# Altium PCB simpleROM.PcbDoc
Units mil, origin at the board's own origin, x right, y up, seen from the top; angles counter-clockwise.
Board outline 1974.25 x 2407 mil, 2 copper layers (Top, Bottom), stack 65.748 mil thick; 4 components, 29 nets, 66 pads, 41 vias.
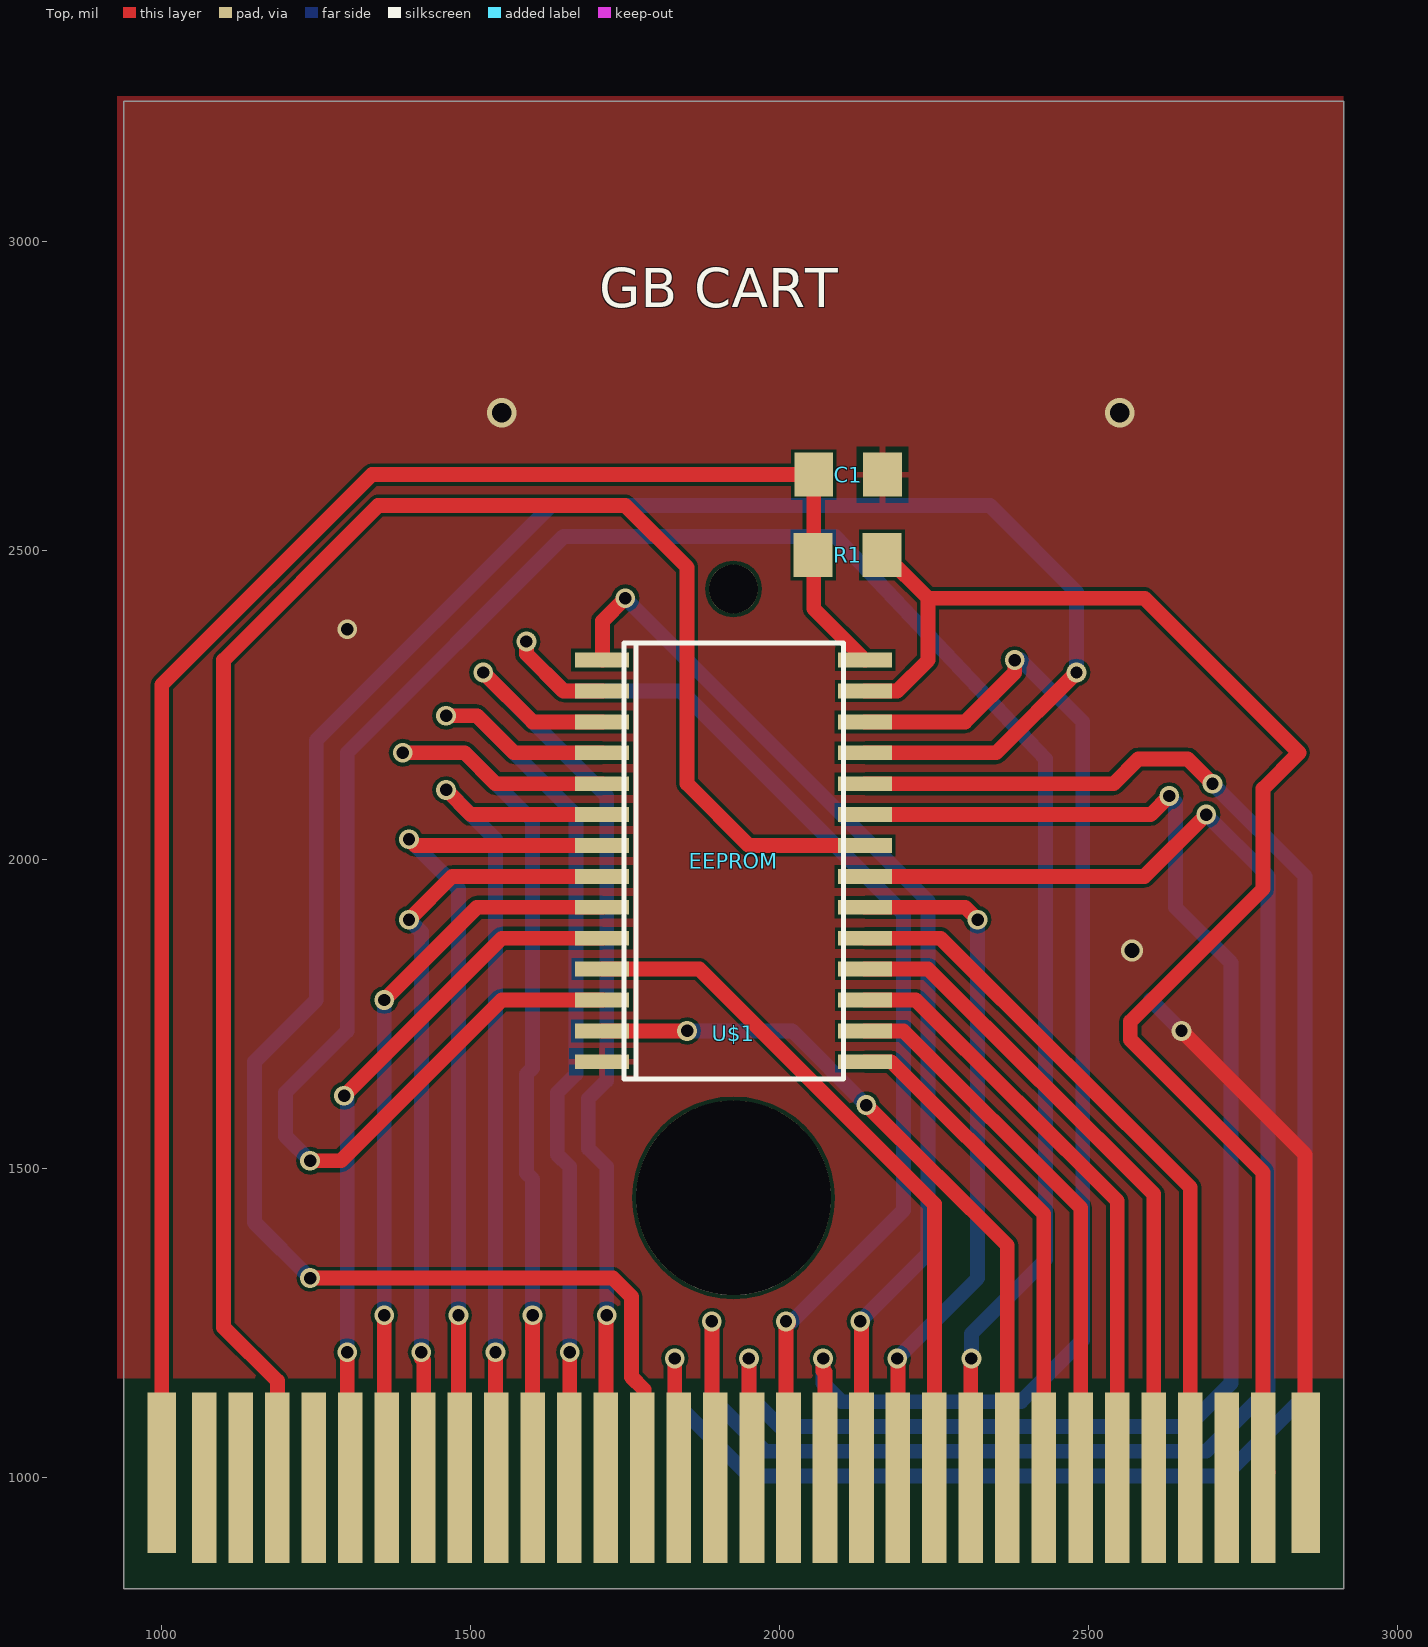
[diagram p0: Top view]
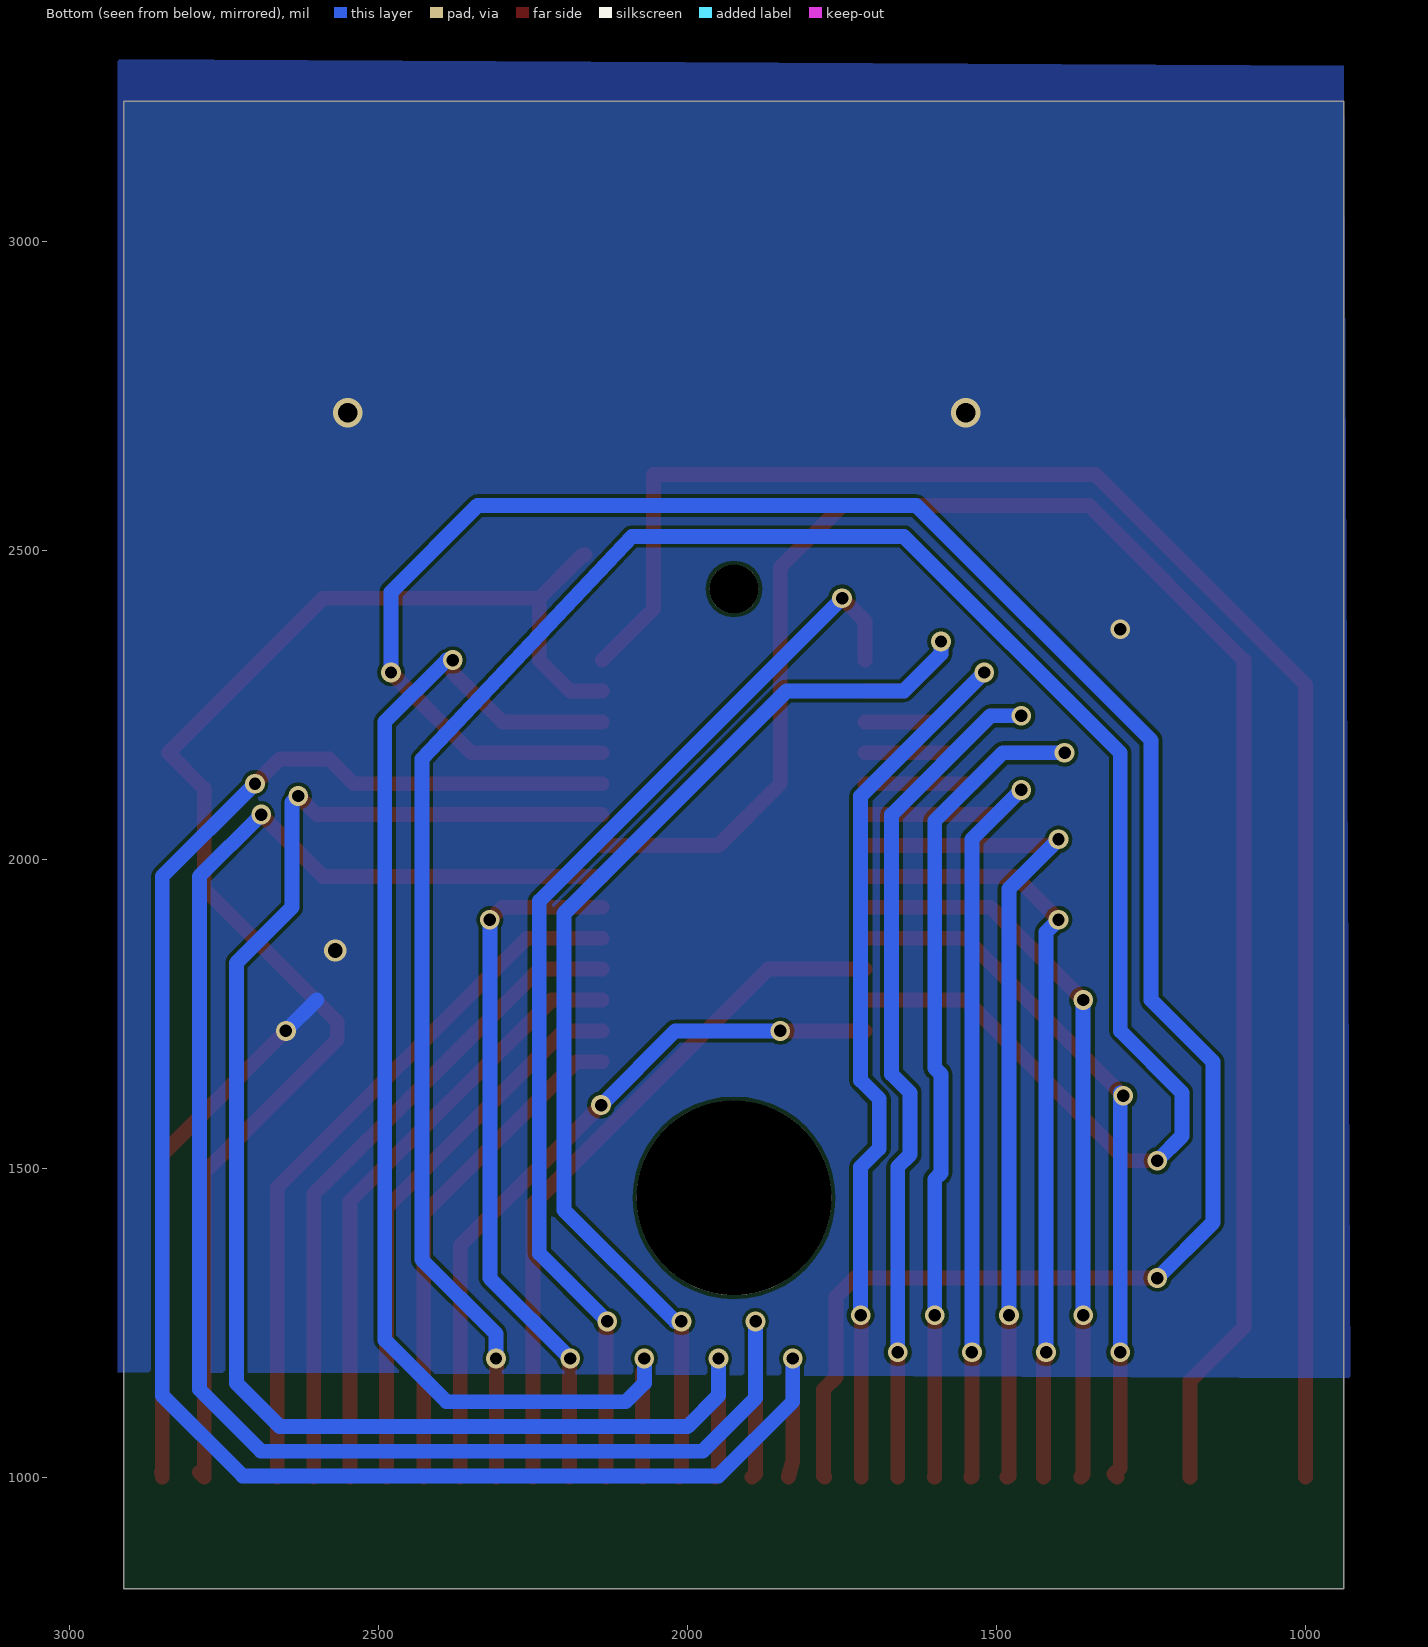
[diagram p1: Bottom view, seen from below]

## Layer stack, top to bottom
Top Solder: solder mask 0.4, Solder Resist, Dk 3.5
Top: signal copper 1.378
Dielectric 1: core 62.9921, FR-4, Dk 4.8
Bottom: signal copper 1.378
Bottom Solder: solder mask 0.4, Solder Resist, Dk 3.5

## Board outline
938.25,819.5 2912.5,819.5 2912.5,3226.5 938.25,3226.5

## Design rules (kind name [scope] priority, off if disabled: settings)
Clearance mdViaVia [IsVia vs IsVia] p1: gap=8
Clearance mdPadVia [IsPad vs IsVia] p2: gap=6
Clearance mdPadPad [IsPad vs IsPad] p3: gap=6
Clearance mdWireVia [(InLayerClass('Signal Layers') AND IsTrack) vs IsVia] p4: gap=6
Clearance mdWirePad [(InLayerClass('Signal Layers') AND IsTrack) vs IsPad] p5: gap=6
Clearance mdWireWire [(InLayerClass('Signal Layers') AND IsTrack) vs (InLayerClass('Signal Layers') AND IsTrack)] p6: gap=6
Clearance [All] p7: gap=6
HoleSize [All] p1: absolutevalues=TRUE maxlimit=100000 minlimit=12 maxpercent=80.000 minpercent=20.000
HoleToHoleClearance [All] p1: gap=8 allowstackedmicrovias=TRUE
PolygonConnect ThermalVias [IsVia] p1: connectstyle=Direct reliefconductorwidth=10 reliefentries=4 polygonreliefangle="90 Angle" airgapwidth=10
PolygonConnect [All] p2: connectstyle=Relief reliefconductorwidth=10 reliefentries=4 polygonreliefangle="90 Angle" airgapwidth=10
RoutingVias [All] p1: holewidth=28 width=50 viastyle="Through Hole" minholewidth=28 minwidth=50 maxholewidth=28 maxwidth=50
SilkToSilkClearance [All] p1 off: silktosilkclearance=10
SilkToSolderMaskClearance [IsPad] p1 off: minsilkscreentomaskgap=10 clearancetoexposedcopper=TRUE
SolderMaskExpansion [All] p1: expansion=0
Width [All] p1: maxlimit=100000 minlimit=6 preferedwidth=10
26 further rules are at their usual default settings.

## Components (designator, comment, footprint, x,y, rotation, side; value= is the part's Value field where it differs from the comment)
C1 "" SPARKFUN-CAPACITORS_1206 2110,2622 r0 top
EEPROM "AT28C256SOIC28" SO28 1925,1997 r270 top
R1 "" SPARKFUN-RESISTORS_1206 2110,2492 r180 top
U$1 "" GBCART 1925,1972 r0 top

## Footprints (in the part's own frame and the unit in brackets; to place one, negate y for a bottom-side part, rotate by r counter-clockwise, add the part's x,y. Pads: shape width x height; smd on the part's side, far side on the other; paste and mask are expansions set on the pad)
GBCART [mil] "GBCART"
  rect 46x260 smd: 1(-925.2,-964.96) 32(926,-964.96)
  round 315 hole 315: 1(0,-520.08)
  round 79 hole 79: 1(0,465)
  rect 40x276 smd: 2(-856.3,-972.83) 3(-797.24,-972.83) 4(-738.19,-972.83) 5(-679.13,-972.83) 6(-620.08,-972.83) 7(-561.02,-972.83) 8(-501.97,-972.83) 9(-442.91,-972.83) 10(-383.86,-972.83) 11(-324.8,-972.83) 12(-265.75,-972.83) 13(-206.69,-972.83) 14(-147.64,-972.83) 15(-88.58,-972.83) 16(-29.53,-972.83) 17(30,-972.83) 18(89,-972.83) 19(148,-972.83) 20(207,-972.83) 21(266,-972.83) 22(325,-972.83) 23(384,-972.83) 24(443,-972.83) 25(502,-972.83) 26(562,-972.83) 27(621,-972.83) 28(680,-972.83) 29(739,-972.83) 30(798,-972.83) 31(857,-972.83)
SO28 [mil] "SO28"
  rect 24x87 smd: 1(-325,-212.6) 2(-275,-212.6) 3(-225,-212.6) 4(-175,-212.6) 5(-125,-212.6) 6(-75,-212.6) 7(-25,-212.6) 8(25,-212.6) 9(75,-212.6) 10(125,-212.6) 11(175,-212.6) 12(225,-212.6) 13(275,-212.6) 14(325,-212.6) 15(325,213) 16(275,213) 17(225,213) 18(175,213) 19(125,213) 20(75,213) 21(25,213) 22(-25,213) 23(-75,213) 24(-125,213) 25(-175,213) 26(-225,213) 27(-275,213) 28(-325,213)
  silkscreen extent -352,-177 353,178
SPARKFUN-CAPACITORS_1206 [mil] "SPARKFUN-CAPACITORS_1206"
  rect 63x71 smd: 1(-55.12,0) 2(56,0)
SPARKFUN-RESISTORS_1206 [mil] "SPARKFUN-RESISTORS_1206"
  rect 63x71 smd: 1(-55.12,0) 2(56,0)

## Part data
C1: library part SPARKFUN-CAPACITORS_1206
EEPROM: library part SO28
R1: library part SPARKFUN-RESISTORS_1206
U$1: library part GBCART

## Via types
v1: diameter 32/32 (per signal layer), hole 20, Top to Bottom, 38 vias
v2: diameter 48/48 (per signal layer), hole 32, Top to Bottom, 2 vias
v3: diameter 36/36 (per signal layer), hole 24, Top to Bottom, 1 vias

## Nets (pads, with @x,y where several pads share a name; then routed paths per layer and width w, separated by ;. In a path a pad name is that pad's centre, name@x,y a point inside that pad or via, vN(x,y) a via of type N, cw(c..) or ccw(c..) an arc to the next point about the centre after c; other vN are vias at no path point)
/CE: EEPROM.20 U$1.21 | length 1147.1
  Top w24: EEPROM.20 2300,1922 v1(2320,1902) ; v1(2190,1192) 2191,1192 U$1.21@2191,1000
  Bottom w24: v1(2190,1192) 2320,1322 v1(2320,1902)
/OE: EEPROM.22 U$1.4 | length 2932.7
  Top w24: U$1.4@1187,1000 1187,1156 1100,1242 1100,2322 1350,2572 1750,2572 1850,2472 1850,2122 1950,2022 EEPROM.22
/WE: EEPROM.27 R1.1 U$1.31 | length 2414.7
  Top w24: EEPROM.27 2190,2272 2240,2322 2240,2422 ; R1.1@2166,2492 2170,2492 2240,2422 ; U$1.31@2790,1008 2782,1000 2782,1493 2567,1708 2567,1737 2782,1952 2782,2114 2840,2172 2590,2422 2240,2422
GND: C1.2 EEPROM.14 U$1.32 | length 883.6
  Top w24: v1(2650,1722) 2850,1522 2850,1122 2850,1000 U$1.32@2851,1008
  Bottom w24: 2600,1772 v1(2650,1722)
  other v1: 1300,2372
  other v2: 1550,2722 2550,2722
  other v3: 2570,1852
N$1: EEPROM.10 U$1.6 | length 1158.9
  Top w24: v1(1295,1617) 1550,1872 EEPROM.10@1713,1872 ; v1(1300,1202) 1300,1015 1310,1005 U$1.6@1305,1000
  Bottom w24: v1(1295,1617) 1300,1622 v1(1300,1202)
N$2: EEPROM.9 U$1.7 | length 1188.8
  Top w24: v1(1360,1262) 1360,1004 U$1.7@1364,1000 ; v1(1360,1772) 1510,1922 EEPROM.9@1713,1922
  Bottom w24: v1(1360,1262) v1(1360,1772)
N$3: EEPROM.8 U$1.8 | length 1254.3
  Top w24: v1(1400,1902) 1470,1972 EEPROM.8@1713,1972 ; v1(1420,1202) 1420,1192 1424,1189 U$1.8@1424,1000
  Bottom w24: v1(1400,1902) 1420,1882 v1(1420,1202)
N$4: EEPROM.7 U$1.9 | length 1383.9
  Top w24: v1(1400,2032) 1410,2022 EEPROM.7@1713,2022 ; v1(1480,1262) 1480,1002 U$1.9@1483,1000
  Bottom w24: v1(1400,2032) 1480,1952 v1(1480,1262)
N$5: EEPROM.6 U$1.10 | length 1415.9
  Top w24: v1(1460,2112) 1500,2072 EEPROM.6@1713,2072 ; v1(1540,1202) 1540,1001 U$1.10@1542,1000
  Bottom w24: v1(1460,2112) 1540,2032 v1(1540,1202)
N$6: EEPROM.5 U$1.11 | length 1670.6
  Top w24: v1(1390,2172) 1490,2172 1540,2122 EEPROM.5@1713,2122 ; v1(1600,1262) 1600,1000 U$1.11@1601,1000
  Bottom w24: v1(1390,2172) 1490,2172 1600,2062 1600,1662 1590,1652 1590,1492 1600,1482 v1(1600,1262)
N$7: EEPROM.4 U$1.12 | length 1646.8
  Top w24: v1(1460,2232) 1510,2232 1570,2172 EEPROM.4@1713,2172 ; U$1.12@1660,1000 v1(1660,1202)
  Bottom w24: v1(1460,2232) 1510,2232 1670,2072 1670,1652 1640,1622 1640,1522 1660,1502 v1(1660,1202)
N$8: EEPROM.3 U$1.13 | length 1635.9
  Top w24: v1(1520,2302) 1600,2222 EEPROM.3@1713,2222 ; U$1.13@1719,1000 1719,1251 v1(1720,1262)
  Bottom w24: v1(1520,2302) 1720,2102 1720,1642 1690,1612 1690,1532 1720,1502 v1(1720,1262)
N$9: EEPROM.25 U$1.14 | length 3753.5
  Top w24: v1(1240,1322) 1730,1322 1760,1292 1760,1162 1780,1142 1780,1002 U$1.14@1778,1000 ; EEPROM.25 2350,2172 v1(2480,2302)
  Bottom w24: v1(1240,1322) 1150,1412 1150,1672 1250,1772 1250,2192 1630,2572 2340,2572 2480,2432 v1(2480,2302)
N$10: EEPROM.24 U$1.15 | length 3033.7
  Top w24: v1(1830,1192) 1830,1026 U$1.15@1837,1000 ; EEPROM.24 2540,2122 2580,2162 2660,2162 v1(2700,2122)
  Bottom w24: v1(1830,1192) 1830,1122 1950,1002 2720,1002 2850,1132 2850,1972 v1(2700,2122)
N$11: EEPROM.21 U$1.16 | length 2920.7
  Top w24: v1(1890,1252) 1890,1005 U$1.16@1896,1000 ; EEPROM.21 2590,1972 v1(2690,2072)
  Bottom w24: v1(1890,1252) 1890,1128 1976,1042 2690,1042 2790,1142 2790,1972 v1(2690,2072)
N$12: EEPROM.23 U$1.17 | length 2580
  Top w24: v1(1950,1192) 1950,1004 U$1.17@1955,1000 ; EEPROM.23 2600,2072 v1(2630,2102)
  Bottom w24: v1(1950,1192) 1950,1132 2000,1082 2660,1082 2730,1152 2730,1832 2640,1922 2640,2092 v1(2630,2102)
N$13: EEPROM.2 U$1.18 | length 1975.4
  Top w24: v1(1590,2352) 1590,2332 1650,2272 EEPROM.2@1713,2272 ; U$1.18@2014,1000 2010,1003 v1(2010,1252) v1@2014,1249
  Bottom w24: v1(1590,2352) 1590,2332 1650,2272 1840,2272 2200,1912 2200,1432 2020,1252 v1(2010,1252)
N$14: EEPROM.26 U$1.19 | length 2154
  Top w24: v1(2070,1192) 2070,1172 2073,1170 U$1.19@2073,1000 ; EEPROM.26 2300,2222 2380,2302 v1(2380,2322)
  Bottom w24: v1(2070,1192) 2070,1152 2100,1122 2390,1122 2490,1222 2490,2222 2390,2322 v1(2380,2322)
N$15: EEPROM.1 U$1.20 | length 1787.1
  Top w24: EEPROM.1@1713,2322 1713,2385 v1(1750,2422) ; v1(2130,1252) 2132,1251 U$1.20@2132,1000
  Bottom w24: v1(1750,2422) 2240,1932 2240,1362 v1(2130,1252)
N$16: EEPROM.19 U$1.29 | length 1161.6
  Top w24: EEPROM.19 2260,1872 2664,1469 U$1.29@2664,1000
N$17: EEPROM.18 U$1.28 | length 1075.5
  Top w24: EEPROM.18 2240,1822 2605,1458 U$1.28@2605,1000
N$20: 
N$22: EEPROM.11 U$1.22 | length 1136.4
  Top w24: EEPROM.11@1713,1822 1870,1822 2250,1442 U$1.22@2250,1000
N$23: EEPROM.12 U$1.23 | length 3940.6
  Top w24: v1(1240,1512) 1290,1512 1550,1772 EEPROM.12@1713,1772 ; U$1.23@2309,1000 2309,1181 v1(2310,1192)
  Bottom w24: v1(1240,1512) 1200,1552 1200,1622 1300,1722 1300,2172 1650,2522 2090,2522 2430,2162 2430,1352 2310,1232 v1(2310,1192)
N$24: EEPROM.13 U$1.24 | length 1173.4
  Top w24: EEPROM.13@1713,1722 v1(1850,1722) ; v1(2140,1602) 2368,1375 U$1.24@2368,1000
  Bottom w24: v1(1850,1722) 2020,1722 v1(2140,1602)
N$25: EEPROM.15 U$1.25 | length 816.6
  Top w24: EEPROM.15 2180,1672 2427,1426 U$1.25@2427,1000
N$26: EEPROM.16 U$1.26 | length 903.2
  Top w24: EEPROM.16 2200,1722 2487,1436 U$1.26@2487,1000
N$27: EEPROM.17 U$1.27 | length 989.3
  Top w24: EEPROM.17 2220,1772 2546,1447 U$1.27@2546,1000
VCC: C1.1 EEPROM.28 R1.2 U$1.1@999.8,1007.04 | length 2812.2
  Top w24: U$1.1@1000,1000 1000,1008 1000,2282 1340,2622 2055,2622 2055,2492 2055,2405 EEPROM.28
pads on no net: U$1.1@1925,1451.92 U$1.1@1925,2437 U$1.2 U$1.3 U$1.5 U$1.30

## Polygon pours and split planes (outlines as drawn)
GND on Top "Top-GND" (solid, remove dead copper, pour order 2): 2912,1160 928,1160 928,3234 2912,3234
GND on Bottom "Bottom-GND" (solid, remove dead copper, pour order 4): 938.06,3283.94 2922,3294.06 2922,1170.06 927.94,1159.94

## Silkscreen, mask and mechanical layers (free items; w line width, h text height)
Top Overlay:
  text "GB CART" at 1707.78,2872 h108.5

## Text inside footprints (layer, text, board x,y; h text height)
C1: tNames ">NAME" at 2060,2667 h24.8; tValues ">VALUE" at 2055,2562 h24.8
EEPROM: tNames ">NAME" at 1775,1597 h49.6; tValues ">VALUE" at 1775,1547 h37.2
R1: tNames ">NAME" at 2160,2447 h24.8 r180; tValues ">VALUE" at 2165,2552 h24.8 r180
U$1: Top Solder "1" at 980.43,1156.65 h42.5; Top Solder "32" at 2801,1156.65 h42.5